# Altium PCB EN1190_EDP_Semester 2_PCB.PcbDoc
Units mm, origin at the board's own origin, x right, y up, seen from the top; angles counter-clockwise.
Board outline 93.34 x 62.61 mm, 2 copper layers (Top Layer, Bottom Layer); 47 components, 30 nets, 166 pads, 162 vias.
Unrouted connection lines stored in the file: 46.
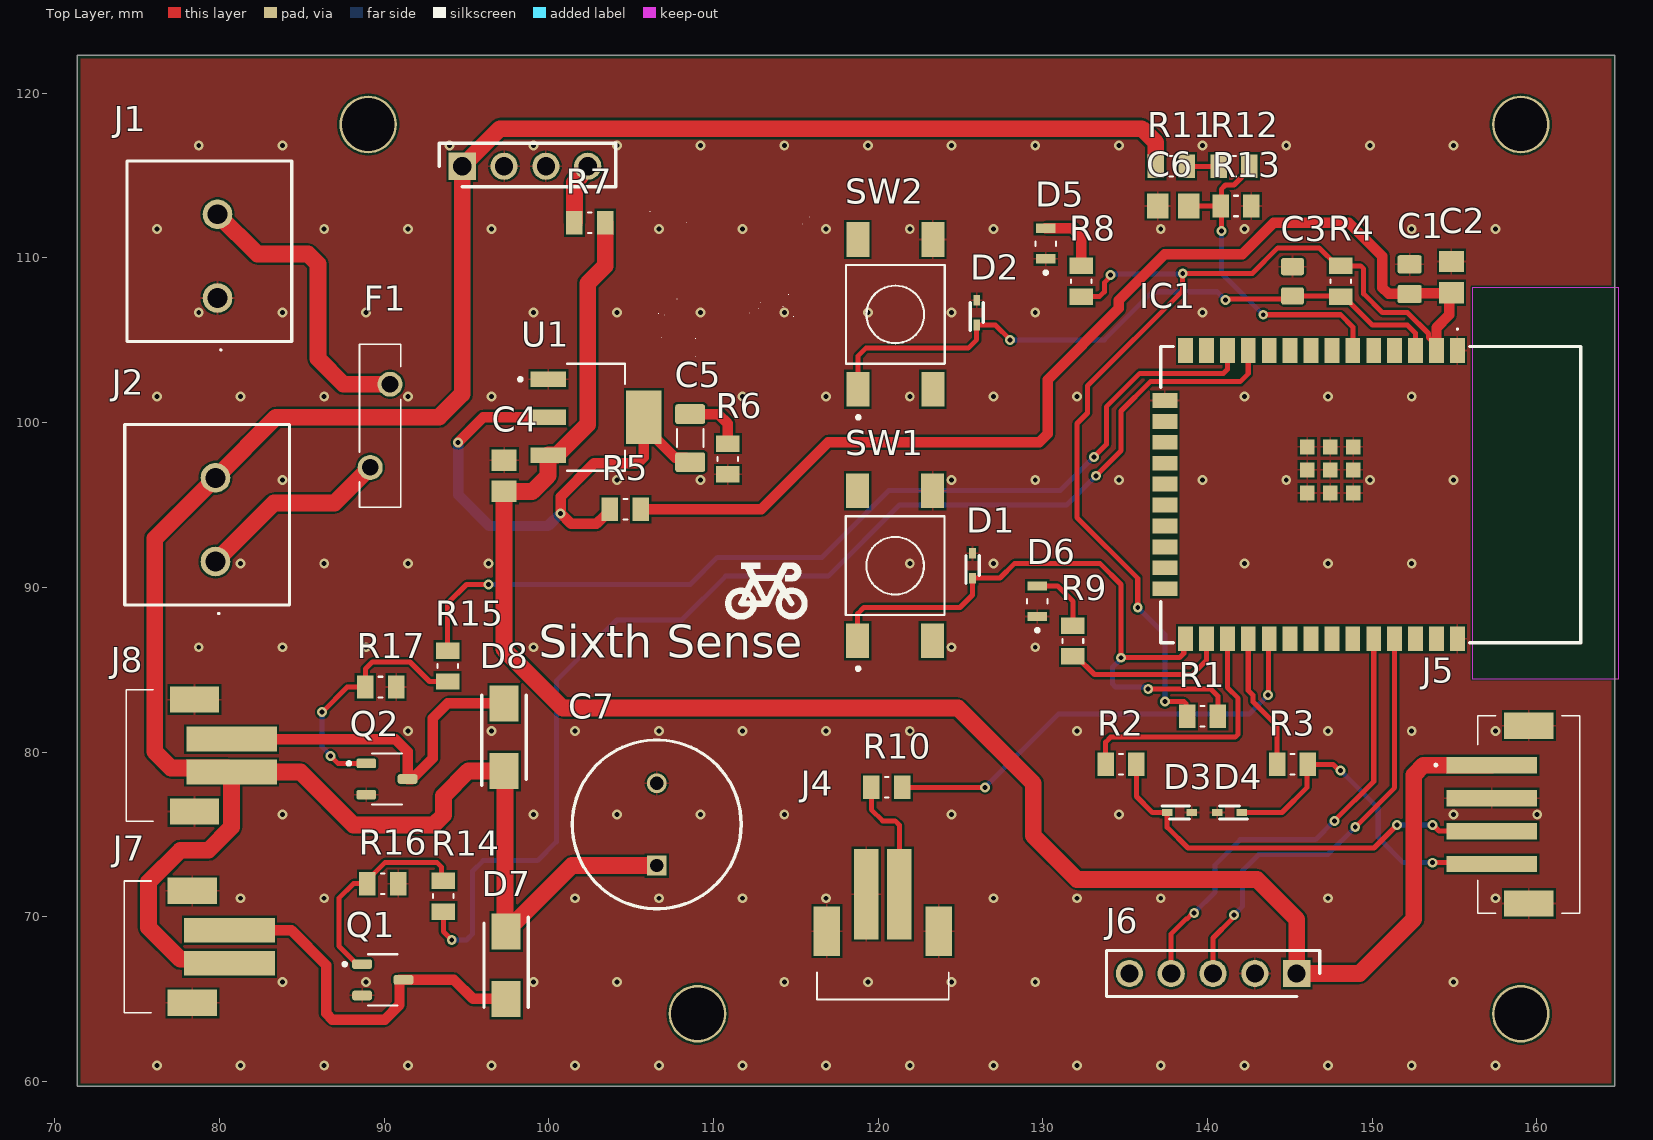
[diagram p0: Top Layer view]
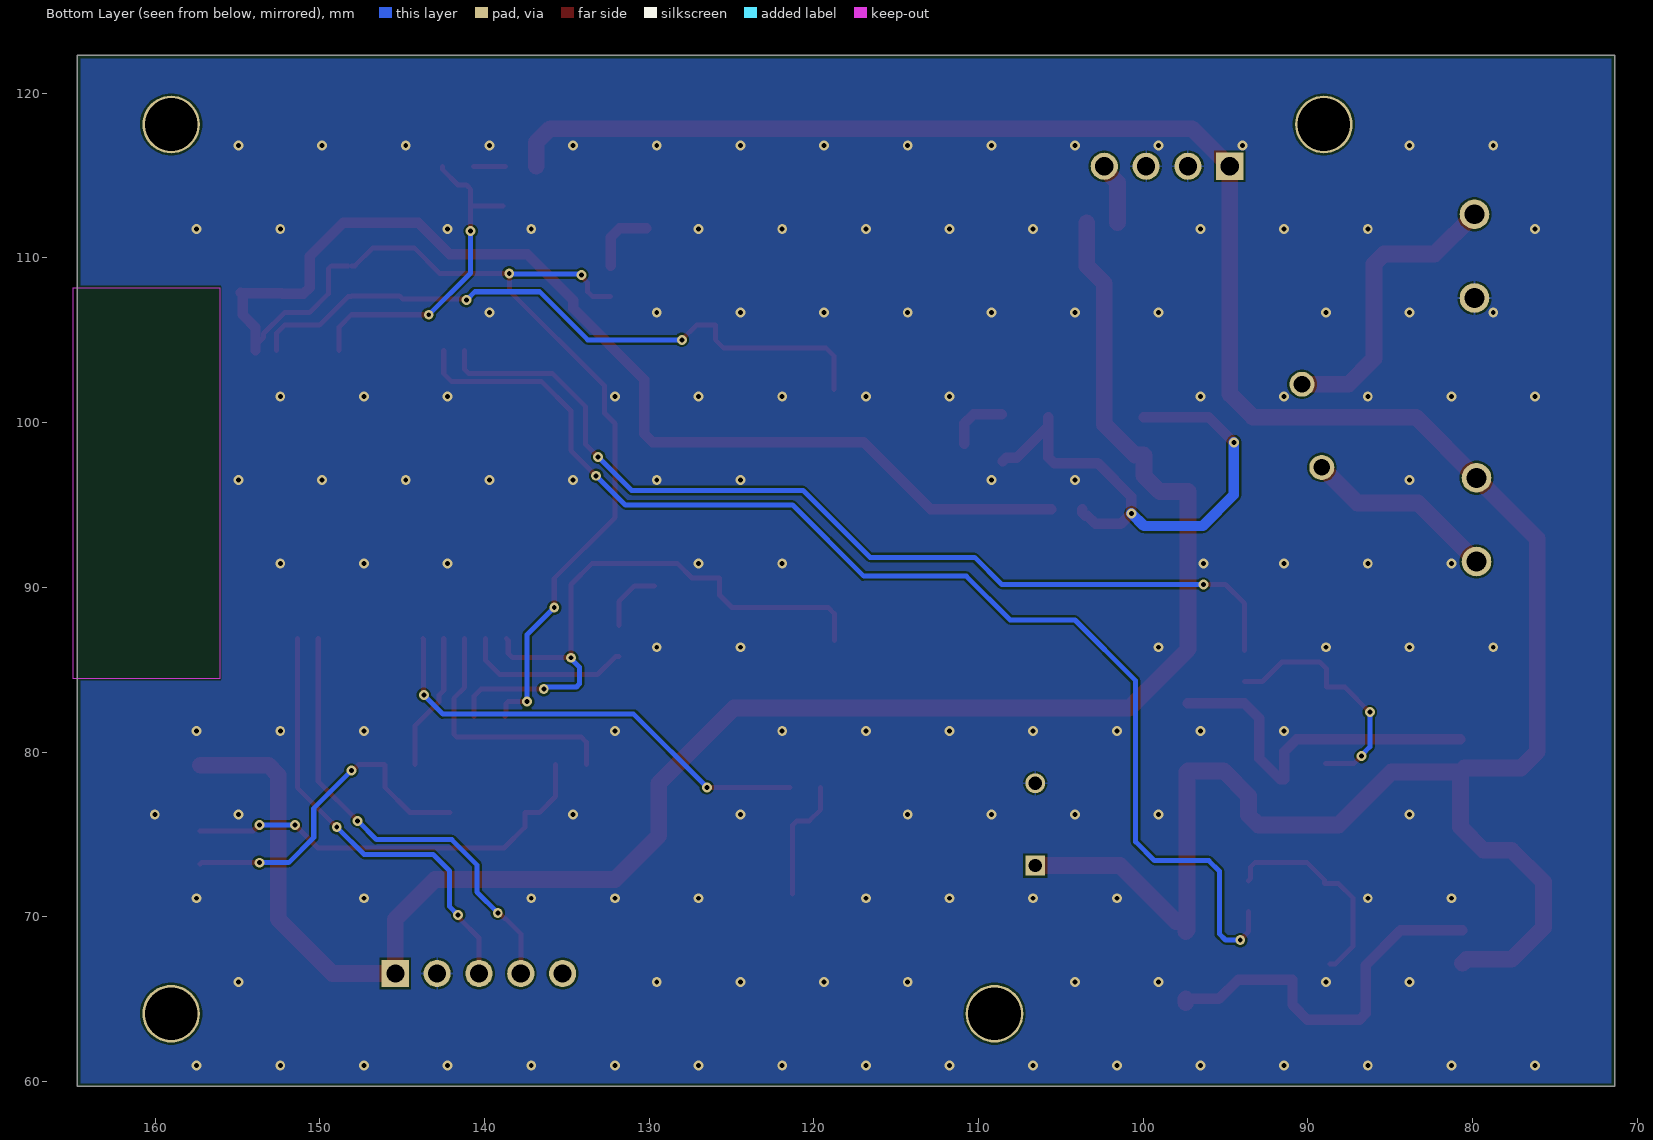
[diagram p1: Bottom Layer view, seen from below]
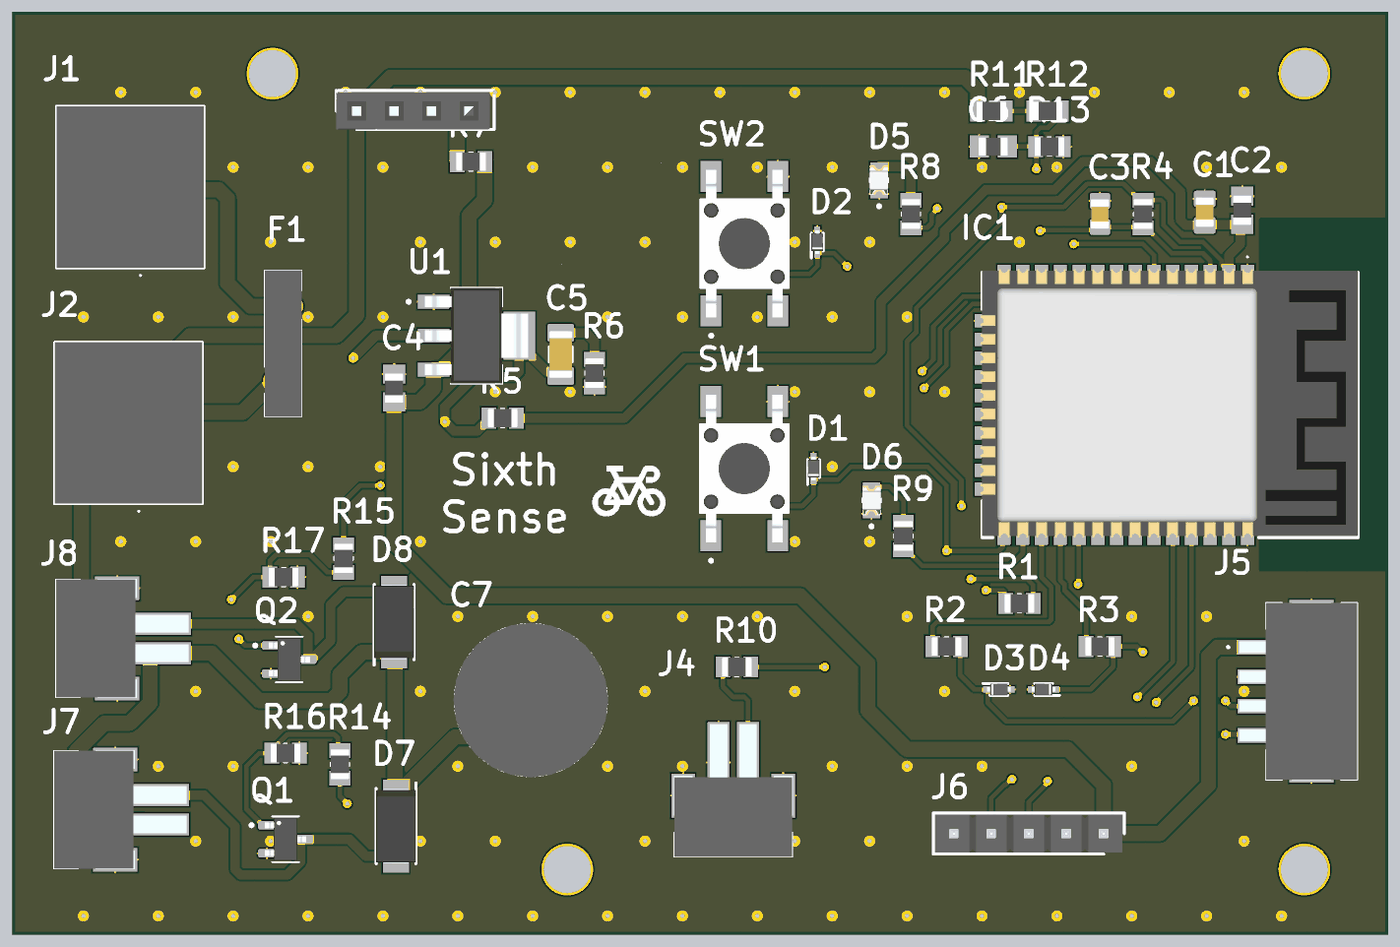
[diagram p2: 3D render of the assembled board from above, using the file's embedded part models]

## Layer stack, top to bottom
Top Solder: solder mask 0.0102, Solder Resist, Dk 3.5
Top Layer: signal copper 0.0356
Dielectric 1: dielectric 0.32, FR-4, Dk 4.8
Bottom Layer: signal copper 0.0356
Bottom Solder: solder mask 0.0102, Solder Resist, Dk 3.5

## Board outline
71.374,59.69 71.374,122.301 164.719,122.301 164.719,59.69

## Design rules (kind name [scope] priority, off if disabled: settings)
BoardOutlineClearance [All] p1: gap=0.2 ignorepadtopadclearanceinfootprint=FALSE
Clearance [All] p1: gap=0.127 ignorepadtopadclearanceinfootprint=FALSE except(0.25: Arc-Hole Track-Hole SMDPad-Hole THPad-Hole Via-Hole Fill-Hole Poly-Hole Region-Hole Text-Hole)
ComponentClearance [All] p1: gap=0.127 collisioncheckmode=3 verticalgap=0.127 showdistances=TRUE
DiffPairsRouting [All] p1: maxlimit=0.254 minlimit=0.127 mostfreqgap=0.127 toplayer_minwidth=0.127 toplayer_maxwidth=25.4 toplayer_prefwidth=0.127 bottomlayer_minwidth=0.127 bottomlayer_maxwidth=25.4 bottomlayer_prefwidth=0.127 maxuncoupledlength=12.7
Height [All] p1: minheight=0 maxheight=1816.048 prefheight=12.7
HoleSize [All] p1: absolutevalues=TRUE maxlimit=6.3 minlimit=0.3 maxpercent=80.000 minpercent=20.000
HoleToHoleClearance [All] p1: gap=0.25 allowstackedmicrovias=FALSE
MinimumAnnularRing [All] p1: minimumring=0.076
MinimumSolderMaskSliver [All] p1: minsoldermaskwidth=0
PlaneClearance [All] p1: clearance=0.127
PlaneConnect PlaneConnectPowerPads [InPadClass('PowerPads')] p1: planeconnectstyle=Direct reliefexpansion=0.508 reliefentries=4 reliefconductorwidth=0.254 reliefairgap=0.254
PlaneConnect [All] p2: pad.planeconnectstyle=Relief pad.reliefexpansion=0.3 pad.reliefentries=4 pad.reliefconductorwidth=0.127 pad.reliefairgap=0.127 via.planeconnectstyle=Direct via.reliefexpansion=0.3 via.reliefentries=4 via.reliefconductorwidth=0.127 via.reliefairgap=0.127
PolygonConnect PolygonConnectPowerPads [All vs (InPadClass('PowerPads'))] p1: connectstyle=Direct reliefconductorwidth=0.254 reliefentries=4 polygonreliefangle="90 Angle" airgapwidth=0.254
PolygonConnect [All] p2: thpad.connectstyle=Relief thpad.reliefconductorwidth=0.127 thpad.reliefentries=4 thpad.polygonreliefangle="90 Angle" thpad.airgapwidth=0.127 smdpad.connectstyle=Relief smdpad.reliefconductorwidth=0.127 smdpad.reliefentries=4 smdpad.polygonreliefangle="90 Angle" smdpad.airgapwidth=0.127 via.connectstyle=Direct via.reliefconductorwidth=0.127 via.reliefentries=4 via.polygonreliefangle="90 Angle" via.airgapwidth=0.127
RoutingVias [All] p1: holewidth=0.3 width=0.6 viastyle="Through Hole" minholewidth=0.3 minwidth=0.6 maxholewidth=0.6 maxwidth=6.6
SilkToSilkClearance [All] p1: silktosilkclearance=0
SilkToSolderMaskClearance [IsPad] p1: minsilkscreentomaskgap=0.127 clearancetoexposedcopper=TRUE
SolderMaskExpansion [All] p1: expansion=0.075 istentingtop=FALSE
Width [All] p1: maxlimit=25.4 minlimit=0.127 preferedwidth=0.127 minimp=50.000000 maximp=50.000000 favimp=50.000000
20 further rules are at their usual default settings.

## Components (designator, comment, footprint, x,y, rotation, side; value= is the part's Value field where it differs from the comment)
C1 "10uF" CAPC2012X145N 152.273,108.712 r270 top
C2 "100nF" CAPC2012X70 154.813,108.839 r90 top
C3 "1uF" CAPC2012X135N 145.161,108.585 r270 top
C4 "100nF" CAPC2012X70 97.282,96.774 r270 top
C5 "22uF" CAPC3216X180N 108.585,99.06 r270 top
C6 "100nF" CAPC2012X70 137.922,113.157 r0 top
C7 "470uF" CAPPRD500W60D1025H1400 106.553,73.105 r90 top value="470 uF"
D1 "ESD5Z3.3T1G" SODFL1608X70N 125.73,91.313 r90 top
D2 "ESD5Z3.3T1G" SODFL1608X70N 125.984,106.68 r90 top
D3 "ESD5Z3.3T1G" SODFL1608X70N 138.303,76.327 r0 top
D4 "ESD5Z3.3T1G" SODFL1608X70N 141.339,76.327 r180 top
D5 "KT-0805W" LED_KT-0805W 130.175,110.871 r90 top
D6 "KT-0805W" LED_KT-0805W 129.667,89.154 r90 top
D7 "SS34" DIOM5127X241N 97.409,67.056 r270 top
D8 "SS34" DIOM5127X241N 97.282,80.899 r90 top
F1 "RGEF500" RGEF500 90.354,102.332 r270 top
IC1 "ESP32-WROOM-32E-N4" ESP32WROOM32EN4 149.914,95.631 r270 top
J1 "WJ500V-5.08-2P" WJ500V5082P 79.883,107.569 r90 top
J2 "WJ500V-5.08-2P" WJ500V5082P 79.756,91.567 r90 top
J3 "MTF185-104SY1" RHDR4W64P0X254_1X4_1041X250X865P 94.742,115.57 r0 top
J4 "A2001WV-S-2P" A2001WVS2P 120.285,71.374 r180 top
J5 "A2001WV-S-4P" A2001WVS4P 159.512,76.2 r270 top
J6 "A2541WV-5P" HDRV5W64P0X254_1X5_1270X254X899P 145.415,66.548 r180 top
J7 "A2001WV-S-2P" A2001WVS2P 80.609,68.17 r90 top
J8 "A2001WV-S-2P" A2001WVS2P 80.736,79.785 r90 top
Q1 "AO3400A" SOT95P280X125-3N 89.916,66.167 r0 top
Q2 "AO3400A" SOT95P280X125-3N 90.17,78.359 r0 top
R1 "10K" RESC2012X65N 139.7,82.169 r180 top
R2 "0Ω" RESC2012X65N 134.747,79.248 r0 top
R3 "0Ω" RESC2012X65N 145.161,79.248 r0 top
R4 "10K" RESC2012X65N 148.082,108.585 r270 top
R5 "0Ω" RESC2012X65N 104.648,94.742 r0 top
R6 "1Ω" RESC2012X65N 110.871,97.79 r270 top
R7 "0Ω" RESC2012X65N 102.489,112.141 r180 top
R8 "330" RESC2012X65N 132.334,108.585 r270 top value="330 Ohms"
R9 "330" RESC2012X65N 131.826,86.741 r270 top value="330 Ohms"
R10 "330" RESC2012X65N 120.523,77.851 r0 top value="330 Ohms"
R11 "10K" RESC2012X65N 137.795,115.57 r180 top
R12 "10K" RESC2012X65N 141.605,115.57 r180 top
R13 "10K" RESC2012X65N 141.732,113.157 r180 top
R14 "100" "RESC2012X65N - duplicate" 93.599,71.247 r90 top value="100 ohm"
R15 "100" "RESC2012X65N - duplicate" 93.853,85.217 r270 top value="100 ohm"
R16 "10K" RESC2012X65N 89.916,72.009 r0 top
R17 "10K" RESC2012X65N 89.789,83.947 r0 top
SW1 "4-1437565-2" SW_4-1437565-2 121.031,91.313 r90 top
SW2 "4-1437565-2" SW_4-1437565-2 121.042,106.575 r90 top
U1 "TLV1117-33CDCYR" SOT230P700X180-4N 102.87,100.33 r0 top

## Footprints (in the part's own frame and the unit in brackets; to place one, negate y for a bottom-side part, rotate by r counter-clockwise, add the part's x,y. Pads: shape width x height; smd on the part's side, far side on the other; paste and mask are expansions set on the pad)
A2001WVS2P [mm]
  rect 1.5x5.5 smd: 1(-1,0) 2(1,0)
  rect 1.6x3 smd: MP1(3.4,2.25) MP2(-3.4,2.25)
  silkscreen extent -4,4.75 4,6.4, body extent -4.04,-2.6 4.04,6.4, height 6.52
A2001WVS4P [mm]
  rect 1x5.5 smd: 1(-3,-2.25) 2(-1,-2.25) 3(1,-2.25) 4(3,-2.25)
  rect 1.6x3 smd: MP1(-5.4,0) MP2(5.4,0)
  silkscreen extent -6,-5.7 6,3.1, body extent -6.04,-4.9 6.04,3.1, height 6.65
CAPC2012X70 [mm]
  rect 1.3x1.5 smd: 1(-0.95,0) 2(0.95,0)
  body extent -1,-0.63 1,0.63, height 0.7
CAPC2012X135N [mm]
  rrect25% 1.05x1.38 smd: 1(-0.888,0) 2(0.888,0)
  body extent -1,-0.63 1,0.63, height 1.35
CAPC2012X145N [mm]
  rrect25% 1.11x1.47 smd: 1(-0.9,0) 2(0.9,0)
  body extent -1,-0.63 1,0.63, height 1.45
CAPC3216X180N [mm]
  rrect25% 1.2x1.82 smd: 1(-1.46,0) 2(1.46,0)
  silkscreen extent -0.54,-0.8 0.54,0.8, body extent -1.6,-0.8 1.6,0.8, height 1.8
CAPPRD500W60D1025H1400 [mm]
  rect 1.2x1.2 hole 0.8: 1(0,0)
  round 1.2 hole 0.8: 2(5,0)
  silkscreen extent -2.62,-5.13 7.62,5.13, body extent -2.75,-5.24 7.75,5.24, height 14
DIOM5127X241N [mm]
  rect 2.2x1.75 smd: 1(-2.05,0) 2(2.05,0)
  silkscreen extent -2.93,-1.35 2.55,1.35, body extent -2.55,-1.35 2.55,1.35, height 2.41
ESP32WROOM32EN4 [mm]
  rect 1.5x0.9 smd: 1(-8.75,5.26) 2(-8.75,3.99) 3(-8.75,2.72) 4(-8.75,1.45) 5(-8.75,0.18) 6(-8.75,-1.09) 7(-8.75,-2.36) 8(-8.75,-3.63) 9(-8.75,-4.9) 10(-8.75,-6.17) 11(-8.75,-7.44) 12(-8.75,-8.71) 13(-8.75,-9.98) 14(-8.75,-11.25) 25(8.75,-11.25) 26(8.75,-9.98) 27(8.75,-8.71) 28(8.75,-7.44) 29(8.75,-6.17) 30(8.75,-4.9) 31(8.75,-3.63) 32(8.75,-2.36) 33(8.75,-1.09) 34(8.75,0.18) 35(8.75,1.45) 36(8.75,2.72) 37(8.75,3.99) 38(8.75,5.26)
  rect 0.9x1.5 smd: 15(-5.715,-12.5) 16(-4.445,-12.5) 17(-3.175,-12.5) 18(-1.905,-12.5) 19(-0.635,-12.5) 20(0.635,-12.5) 21(1.905,-12.5) 22(3.175,-12.5) 23(4.445,-12.5) 24(5.715,-12.5)
  rect 0.9x0.9 smd: 39(-2.9,-1.06) 40(-2.9,-2.46) 41(-2.9,-3.86) 42(-1.5,-3.86) 43(-0.1,-3.86) 44(-0.1,-2.46) 45(-0.1,-1.06) 46(-1.5,-1.06) 47(-1.5,-2.46)
  silkscreen extent -10.1,-12.75 9,12.75, body extent -9.21,-12.84 8.98,12.75, height 3.2
HDRV5W64P0X254_1X5_1270X254X899P [mm]
  rect 1.65x1.65 hole 1.1: 1(0,0)
  round 1.65 hole 1.1: 2(2.54,0) 3(5.08,0) 4(7.62,0) 5(10.16,0)
  silkscreen extent -1.4,-1.4 11.56,1.4, body extent -1.27,-1.27 11.43,1.27, height 8.99
LED_KT-0805W [mm]
  rect 0.57x1.2 smd: 1(-0.925,0) 2(0.925,0)
  silkscreen extent -1.86,-0.63 0.13,0.63, body extent -1,-0.63 1,0.63, height 0.8
RESC2012X65N [mm]
  rect 1x1.42 smd: 1(-0.935,0) 2(0.935,0)
  silkscreen extent -0.12,-0.63 0.12,0.63, body extent -1,-0.63 1,0.63, height 0.65
"RESC2012X65N - duplicate" [mm]
  rect 1x1.42 smd: 1(-0.935,0) 2(0.935,0)
  silkscreen extent -0.12,-0.63 0.12,0.63, body extent -1,-0.63 1,0.63, height 0.65
RGEF500 [mm]
  round 1.515 hole 1.01: 1(0,0) 2(5.05,-1.2)
  silkscreen extent -2.42,-1.85 7.47,0.65, body extent -2.42,-1.85 7.47,0.65, height 14.4
RHDR4W64P0X254_1X4_1041X250X865P [mm]
  rect 1.65x1.65 hole 1.1: 1(0,0)
  round 1.65 hole 1.1: 2(2.54,0) 3(5.08,0) 4(7.62,0)
  silkscreen extent -1.4,-1.25 9.32,1.4, body extent -1.4,-1.25 9.02,1.25, height 8.65
SODFL1608X70N [mm]
  rect 0.64x0.42 smd: 1(-0.75,0) 2(0.75,0)
  silkscreen extent -1.07,-0.4 0.6,0.4, body extent -0.8,-0.4 0.8,0.4, height 0.7
SOT95P280X125-3N [mm]
  rrect50% 1.21x0.59 smd: 1(-1.255,0.95) 2(-1.255,-0.95) 3(1.255,0)
  silkscreen extent -2.41,-1.55 0.9,1.55, body extent -1.4,-1.45 1.4,1.45, height 1.25
SOT230P700X180-4N [mm]
  rect 2.15x0.95 smd: 1(-2.9,2.3) 2(-2.9,0) 3(-2.9,-2.3)
  rect 2.15x3.25 smd: 4(2.9,0)
  silkscreen extent -4.7,-3.25 1.75,3.25, body extent -3.5,-3.25 3.5,3.25, height 1.8
SW_4-1437565-2 [mm]
  rect 2.1x1.4 smd: 1(-4.55,2.275) 2(4.55,2.275) 3(-4.55,-2.275) 4(4.55,-2.275)
  silkscreen extent -6.35,-3 3,3, body extent -5,-3 5,3, height 5.38
WJ500V5082P [mm]
  round 1.8 hole 1.2: 1(0,0) 2(5.08,0)
  silkscreen extent -3.2,-4.5 8.32,5.5, body extent -2.64,-4.5 8.32,5.5, height 14.3

## Part data
C1: library part CL21A106KAYNNNE, "10uF ±10% 25V Ceramic Capacitor X5R 0805", JLCPCB Part Number=C15850, Manufacturer="Samsung Electro-Mechanics", ComponentLink1Description=Datasheet, ComponentLink1URL=https://jlc-prod-smt.oss-eu-central-1.aliyuncs.com/smtDataManualFile/8579706853607202816-C15850.pdf?response-content-disposition=attachment%3B%20filename%3DC15850.pdf%3B%20filename%2A%3DUTF-8%27%27C15850.pdf&x-oss-date=20260411T105511Z&x-oss-expires=1800&x-oss-security-token=CAISgAN1q6Ft5B2yfSjIr5mHBczCp%2BpM0aimbG72lWcPTrsdp4f41zz2IHhMdHJsAOodtv0%2FmmhT6PkclqRLcbhpcmfjV%2BZHzLB8qakU4QF%2B4J7b16cNrbH4M4H6aXeirtuwDsz9SNTCALjPD3nPii50x5bjaDymRCbLGJaViJlhHLN1Ow6jdmhpCctxLAlvo9NgFxm3D%2Fu2NQPwiWf9FVdhvhEG6Vly8qOi2MaRmFy8yFTx0b0SvJ%2BjYMrmPctoN9JnSdC5mfdzau3a1TJ84gRD0a5wkaVA1zbDs5bfISEIuUzebreLqY03dV4mOvdqIcMe8qigz88fk%2FfIioH6xyxKOexoSCnFTOiiupCcQLPyao9jLu6iayqViY7QaIOTqQohZmkAMwVOasAsI3Ngh4zF97Qt0cVNkXO9gWfLI8DtuMleWsqp384DfnSgc5lCkRRYwGs1287ugXlSQzo890KPDAEovaKCnZ2ZSfh7Y4sNknI6i%2Bfc2Se2MIkISql4QaKWD5sagAEl%2FZh4y0mMFih4O2qONNFgo7OWr5xiyzqit1WFcmyLUIQ2NX%2Fko74FscrX5Z2PR81zrkE2%2BnLnFVK6SDKZ8Rrb9W3QelFNDx6QYlqH4AjNB9BxVOfYIzA8I8Ll0VvOEyDZ7hj5WXI%2BIfDeUmHR%2FNs6j%2FCz6XaWmqPEfMDbSSnTGiAA&x-oss-signature-version=OSS4-HMAC-SHA256&x-oss-credential=STS.NZ2NvvJ5mfjMnHGqgZB41HBS5%2F20260411%2Feu-central-1%2Foss%2Faliyun_v4_request&x-oss-signature=e4669f9a7ebed36f2888fbdcc03d20f0a9c6abf700cb8098047f1d5397c325ce, LCSC Part Number=C15850, Manufacturer Part Number=CL21A106KAYNNNE
C2 C4 C6: library part CC0805KRX7R9BB104, "100nF ±10% 50V Ceramic Capacitor X7R 0805", JLCPCB Part Number=C49678, Manufacturer=YAGEO, ComponentLink1Description=Datasheet, ComponentLink1URL=https://jlc-prod-smt.oss-eu-central-1.aliyuncs.com/smtDataManualFile/8579706882459549696-C49678.pdf?response-content-disposition=attachment%3B%20filename%3DC49678.pdf%3B%20filename%2A%3DUTF-8%27%27C49678.pdf&x-oss-date=20260411T120022Z&x-oss-expires=1800&x-oss-security-token=CAISgAN1q6Ft5B2yfSjIr5nGc%2B%2Fng%2BZTz6qoZ1LerE00VusYva%2FoiTz2IHhMdHJsAOodtv0%2FmmhT6PkclqRLcbhpcmfjV%2BZHzLB8qZxIqQR%2B4J7b16cNrbH4M4H6aXeirtuwDsz9SNTCALjPD3nPii50x5bjaDymRCbLGJaViJlhHLN1Ow6jdmhpCctxLAlvo9NgFxm3D%2Fu2NQPwiWf9FVdhvhEG6Vly8qOi2MaRmFy8yFTx0b0SvJ%2BjYMrmPctoN9JnSdC5mfdzau3a1TJ84gRD0a5wkaVA1zbDs5bfISEIuUzebreLqY03dV4mOvdqIcMe8qigz88fk%2FfIioH6xyxKOexoSCnFTOiiupCcQLPyao9jLu6iayqViY7QaIOTqQohZmkAMwVOasAsI3Ngh4zF97Qt0cVNkXO9gWfLI8DtuMleWgpjW%2BgjfnSgc5lCkRRYwGs1287ugXlSQzo890KPDAEovaKCnZ2ZSfh7Y4sNknI6i%2Bfc2Se2MIkIet4joqKWD5sagAGoaAFtiNH%2BVqesP4Xd%2FicMChU4hC%2BfFSKA8gk%2FP%2BHFmqX9GC9FZogyDW2xwxXMN%2BJ5kWUM5GYkddsvBUaVRQY2O5hriYbqbheGKrzCEsRoZQpM1BVK9kdwDFJRIKfktOAz8byi%2FH7to7wLWy8UkpOhwQ%2B%2BZ%2FjjINlLWCMSxpgZsCAA&x-oss-signature-version=OSS4-HMAC-SHA256&x-oss-credential=STS.NZs8USn9rxhCetoHMaZd4RjCk%2F20260411%2Feu-central-1%2Foss%2Faliyun_v4_request&x-oss-signature=707c7aad44b40ae88f8940f66cbb3d06b4fd0582da1b3e21eb645b0540d9b004, LCSC Part Number=C49678, Manufacturer Part Number=CC0805KRX7R9BB104
C3: library part CL21B105KBFNNNE, "1uF ±10% 50V Ceramic Capacitor X7R 0805", JLCPCB Part Number=C28323, Manufacturer="Samsung Electro-Mechanics", ComponentLink1Description=Datasheet, ComponentLink1URL=https://jlcpcb.com/api/file/downloadByFileSystemAccessId/8579706862004473856, LCSC Part Number=C28323, Manufactuer Part Number=CL21B105KBFNNNE
C5: library part CL31A226KOHNNNE, "22uF ±10% 16V Ceramic Capacitor X5R 1206", Dielectric=X5R, LCSC Part Number=C90146, Package=1206, Voltage Rating=16V, ComponentLink1Description=Datasheet, ComponentLink1URL=https://www.lcsc.com/datasheet/C90146.pdf?spm=wm.sxq.inf.ggs___wm.ssy.bg.0.xh&lcsc_vid=RABaBF1SE1RfBlVeElBYVQJWQVdaBVJRQ1JYAwFXQFYxVlNRQlFcXlNeTlVbUjsOAxUeFF5JWBYZEEoKFBINSQcJGk4dAgUUFAk%3D
C7: library part 25YXJ470M10X12.5, "470uF 25V Aluminum Electrolytic Capacitors Through Hole,D10xL12.5mm 10000hrs@105℃", JLCPCB Part Number=C88740, Manufacturer=Rubycon, ComponentLink1Description=Datasheet, ComponentLink1URL=https://jlc-prod-smt.oss-eu-central-1.aliyuncs.com/smtDataManualFile/8588887453180563456-C88740.pdf?response-content-disposition=attachment%3B%20filename%3DC88740.pdf%3B%20filename%2A%3DUTF-8%27%27C88740.pdf&x-oss-date=20260411T113131Z&x-oss-expires=1800&x-oss-security-token=CAISgAN1q6Ft5B2yfSjIr5mHBczCp%2BpM0aimbG72lWcPTrsdp4f41zz2IHhMdHJsAOodtv0%2FmmhT6PkclqRLcbhpcmfjV%2BZHzLB8qakU4QF%2B4J7b16cNrbH4M4H6aXeirtuwDsz9SNTCALjPD3nPii50x5bjaDymRCbLGJaViJlhHLN1Ow6jdmhpCctxLAlvo9NgFxm3D%2Fu2NQPwiWf9FVdhvhEG6Vly8qOi2MaRmFy8yFTx0b0SvJ%2BjYMrmPctoN9JnSdC5mfdzau3a1TJ84gRD0a5wkaVA1zbDs5bfISEIuUzebreLqY03dV4mOvdqIcMe8qigz88fk%2FfIioH6xyxKOexoSCnFTOiiupCcQLPyao9jLu6iayqViY7QaIOTqQohZmkAMwVOasAsI3Ngh4zF97Qt0cVNkXO9gWfLI8DtuMleWsqp384DfnSgc5lCkRRYwGs1287ugXlSQzo890KPDAEovaKCnZ2ZSfh7Y4sNknI6i%2Bfc2Se2MIkISql4QaKWD5sagAEl%2FZh4y0mMFih4O2qONNFgo7OWr5xiyzqit1WFcmyLUIQ2NX%2Fko74FscrX5Z2PR81zrkE2%2BnLnFVK6SDKZ8Rrb9W3QelFNDx6QYlqH4AjNB9BxVOfYIzA8I8Ll0VvOEyDZ7hj5WXI%2BIfDeUmHR%2FNs6j%2FCz6XaWmqPEfMDbSSnTGiAA&x-oss-signature-version=OSS4-HMAC-SHA256&x-oss-credential=STS.NZ2NvvJ5mfjMnHGqgZB41HBS5%2F20260411%2Feu-central-1%2Foss%2Faliyun_v4_request&x-oss-signature=1a71cdcfdccf2f12d85f81b9bbe3019779a73c3eac2156f4ea9bb6aa6537d4d7, LCSC Part Number=C88740, Manufacturer Part Number=25YXJ470M10X12.5
D1 D2 D3 D4: "14.1VC Clamp 11.2A Ipp TVS DIODE SOD-523", JLCPCB Part Number=C61148, Manufacturer=onsemi, Package=SOD-523, LCSC Part Number=C61148, Manufactuer Part Number=ESD5Z3.3T1G
D5 D6: "White LED Indication - Discrete 2.6V~3.2V 0805", JLCPCB Part Number=C34499, Manufacturer="Hubei KENTO Elec", Package=0805, ComponentLink1Description=Datasheet, ComponentLink1URL=https://jlc-prod-smt.oss-eu-central-1.aliyuncs.com/smtDataManualFile/8579709217554550784-C34499.pdf?response-content-disposition=attachment%3B%20filename%3DC34499.pdf%3B%20filename%2A%3DUTF-8%27%27C34499.pdf&x-oss-date=20260411T184242Z&x-oss-expires=1800&x-oss-security-token=CAISgAN1q6Ft5B2yfSjIr5rxL87d1ahJ54SaRGiFlmVtZtlOi%2FzfgDz2IHhMdHJsAOodtv0%2FmmhT6PkclqRLcbhpcmfjV%2BZHzLB8qedY9A1%2B4J7b16cNrbH4M4H6aXeirtuwDsz9SNTCALjPD3nPii50x5bjaDymRCbLGJaViJlhHLN1Ow6jdmhpCctxLAlvo9NgFxm3D%2Fu2NQPwiWf9FVdhvhEG6Vly8qOi2MaRmFy8yFTx0b0SvJ%2BjYMrmPctoN9JnSdC5mfdzau3a1TJ84gRD0a5wkaVA1zbDs5bfISEIuUzebreLqY03dV4mOvdqIcMe8qigz88fk%2FfIioH6xyxKOexoSCnFTOiiupCcQLPyao9jLu6iayqViY7QaIOTqQohZmkAMwVOasAsI3Ngh4zF97Qt0cVNkXO9gWfLI8DtuMleWhqk2cFN4NHD0eS19jklBdzSlusJRAJJUVBflCeKEaRNSAd3WGhEfM2%2BBt4QT30w5N2u00S8OSMI6E2D5aKWD5sagAFK8BQxMu8mWm493Yp8afuko%2BzCNYQ%2Fa05kesz6Q%2FupjBJH0QROBTrIeTMPgE8%2BlaT39xZqteU6mYIp0xOFqOLJoWNfG8KcrwmMtaWL3ntf0XKyARj9oJ%2FZoCX14gg3wra056deeiiUhn7e1b6JV2uHe3%2BhOvW6pNMsqkWNyqxHxSAA&x-oss-signature-version=OSS4-HMAC-SHA256&x-oss-credential=STS.NYDdti8whPFqFN4re8jVbd9tb%2F20260411%2Feu-central-1%2Foss%2Faliyun_v4_request&x-oss-signature=fb576c8a806889d858e314a909d44b6f08958b502a4255edb32084c04d6872af, LCSC Part Number=C34499, Manufacturer Part Number=KT-0805W
D7 D8: library part "SS34 SMA", "Diode Independent 40V 3A Surface Mount SMA(DO-214AC)", JLCPCB Part Number=C8678, Manufacturer="MDD(Microdiode Semiconductor)", ComponentLink1Description=Datasheet, ComponentLink1URL=https://www.lcsc.com/datasheet/C8678.pdf?spm=wm.sxq.inf.ggs___wm.ssy.bg.2.xh&lcsc_vid=RABaBF1SE1RfBlVeElBYVQJWQVdaBVJRQ1JYAwFXQFYxVlNRQlBfVVNfT1hcXzsOAxUeFF5JWBYZEEoKFBINSQcJGk4dAgUUFAk%3D, LCSC Part Number=C8678, Manufacturer Part Number=SS34
F1: "Polymeric PTC Resettable Fuse 16V 5A Through Hole P=5.08mm", JLCPCB Part Number=C468988, Manufacturer=Littelfuse, LCSC Part Number=C468988, Manufacturer Part Number=RGEF500
IC1: "2.4GHz On-board PCB Antenna -98dBm SMD,25.5x18mm RF Transceiver Modules and Modems RoHS", LCSC Part Number=C701341, Manufacturer_Name="Espressif Systems", Mouser Part Number=356-ESP32WRM32E132PH, ComponentLink1Description=Datasheet, ComponentLink1URL=https://jlcpcb.com/api/file/downloadByFileSystemAccessId/8588886930931535873, Datasheet Link=https://www.espressif.com/sites/default/files/documentation/esp32-wroom-32e_esp32-wroom-32ue_datasheet_en.pdf, Height=3.25mm, Manufacturer_Part_Number=ESP32-WROOM-32E-N4, Mouser Price/Stock=https://www.mouser.co.uk/ProductDetail/Espressif-Systems/ESP32-WROOM-32E-N4?qs=Li%252BoUPsLEnsPzTWsi%252BRMgQ%3D%3D
J1 J2: "2 Position Wire to Board Terminal Block Through Hole 5.08mm", JLCPCB Part Number=C8465, Manufacturer_Name="Ningbo Kangnex", ComponentLink1Description=Datasheet, ComponentLink1URL=https://www.lcsc.com/datasheet/C8465.pdf?spm=wm.sxq.inf.ggs___wm.ssy.bg.0.xh&lcsc_vid=RABaBF1SE1RfBlVeElBYVQJWQVdaBVJRQ1JYAwFXQFYxVlNRQlBcUlZfQFdbVDsOAxUeFF5JWBYZEEoKFBINSQcJGk4eFQsCAgIaSgADAwAHC0slRVNbVVZeWQkaCgg%3D, Datasheet Link=https://datasheet.lcsc.com/szlcsc/1912251636_Ningbo-Kangnex-Elec-WJ500V-5-08-2P_C8465.pdf, Height=14.2mm, LCSC Part Number=C8465, Manufacturer_Part_Number=WJ500V-5.08-2P
J3: "Female Header 4 Position 2.54mm Pitch Single Row Through Hole", LCSC Part Number=C358718, Manufacturer=Mintron, ComponentLink1Description=Datasheet, ComponentLink1URL=*https://www.lcsc.com/datasheet/C358718.pdf?spm=wm.sxq.inf.ggs___wm.ssy.bg.0.xh&lcsc_vid=RABaBF1SE1RfBlVeElBYVQJWQVdaBVJRQ1JYAwFXQFYxVlNRQlFdX1FeQFhaUzsOAxUeFF5JWBYZEEoKFBINSQcJGk4%3D, Pitch=2.54mm
J4 J7 J8: "Connector Header 2 position 2mm Pitch", JLCPCB Part Number=C225226, Manufacturer_Name="Changjiang Connectors", ComponentLink1Description=Datasheet, ComponentLink1URL=https://www.lcsc.com/datasheet/C225226.pdf?spm=wm.sxq.inf.ggs___wm.ssy.bg.0.xh&lcsc_vid=RABaBF1SE1RfBlVeElBYVQJWQVdaBVJRQ1JYAwFXQFYxVlNRQlBcVVBUQldZXzsOAxUeFF5JWBYZEEoKFBINSQcJGk4dAgUUFAk%3D, Datasheet Link=https://datasheet.lcsc.com/szlcsc/Changjiang-Connectors-A2001WV-S-2P_C225226.pdf, Height=6.42mm, LCSC Part Number=C225226, Manufacturer_Part_Number=A2001WV-S-2P
J5: "Connector Header 4 position 2mm Pitch", JLCPCB Part Number=C225228, Manufacturer_Name=CJT, ComponentLink1Description=Datasheet, ComponentLink1URL=https://www.lcsc.com/datasheet/C225228.pdf?spm=wm.sxq.inf.ggs___wm.ssy.bg.1.xh&lcsc_vid=RABaBF1SE1RfBlVeElBYVQJWQVdaBVJRQ1JYAwFXQFYxVlNRQlBcVFFXT1hWVDsOAxUeFF5JWBYZEEoKFBINSQcJGk4dAgUUFAk%3D, Datasheet Link=https://datasheet.lcsc.com/szlcsc/1912111437_CNJM-A2001WV-S-4P_C375145.pdf, Height=6.55mm, LCSC Part Number=C225228, Manufacturer_Part_Number=A2001WV-S-4P
J6: "Pin Header 5 Position 2.54mm Pitch Single Row Through Hole -40℃~+105℃", JLCPCB Part Number=C225480, Manufacturer_Name="Changjiang Connectors", ComponentLink1Description=Datasheet, ComponentLink1URL=https://jlcpcb.com/api/file/downloadByFileSystemAccessId/8588890082421428224, Datasheet Link=https://datasheet.lcsc.com/lcsc/2010160505_CJT-Changjiang-Connectors-A2541WV-5P_C225480.pdf, Height=8.99mm, LCSC Part Number=C225480, Manufacturer_Part_Number=A2541WV-5P
Q1 Q2: "N-Channel 30 V 5.7A (Ta) 1.4W (Ta) Surface Mount SOT-23-3", JLCPCB Part Number=C20917, Manufacturer=AOS, Package="SOT-23 Alpha &amp; Omega Semiconductor Inc.", Check_prices=https://www.snapeda.com/parts/AO3400A/Alpha/view-part/?ref=eda, ComponentLink1Description=Datasheet, ComponentLink1URL=https://jlcpcb.com/api/file/downloadByFileSystemAccessId/8550723985357750272, LCSC Part Number=C20917, Manufacturer Part Number=AO3400A, MF="Alpha & Omega Semiconductor", MP=AO3400A, SnapEDA_Link=https://www.snapeda.com/parts/AO3400A/Alpha/view-part/?ref=snap
R1 R4 R11 R12 R13 R16 R17: library part 0805W8F1002T5E, "10kΩ ±1% 125mW 0805 Thick Film Resistor", JLCPCB Part Number=C17414, Manufactuer=UNI-ROYAL, ComponentLink1Description=Datasheet, ComponentLink1URL=https://www.lcsc.com/datasheet/C17414.pdf?spm=wm.sxq.inf.ggs___wm.ssy.bg.0.xh&lcsc_vid=RABaBF1SE1RfBlVeElBYVQJWQVdaBVJRQ1JYAwFXQFYxVlNRQlFbUFdWRVVaXjsOAxUeFF5JWBYZEEoKFBINSQcJGk4dAgUUFAk%3D, LCSC Part Number=C17414, Manufactuer Part Number=0805W8F1002T5E
R2 R3 R5 R7: library part 0805W8F0000T5E, "0Ω ±1% 125mW 0805 Thick Film Resistor", JLCPCB Part Number=C17477, Manufacturer=UNI-ROYAL, Package=0805, ComponentLink1Description=Datasheet, ComponentLink1URL=https://jlc-prod-smt.oss-eu-central-1.aliyuncs.com/smtDataManualFile/8579706711109648384-C17477.pdf?response-content-disposition=attachment%3B%20filename%3DC17477.pdf%3B%20filename%2A%3DUTF-8%27%27C17477.pdf&x-oss-date=20260412T143321Z&x-oss-expires=1800&x-oss-security-token=CAISgAN1q6Ft5B2yfSjIr5nyO4nX2q9R5biEUnLE00gMPuhu3abSozz2IHhMdHJsAOodtv0%2FmmhT6PkclqRLcbhpcmfjV%2BZHzLB8qZpNjnBx4J7b16cNrbH4M4H6aXeirtuwDsz9SNTCALjPD3nPii50x5bjaDymRCbLGJaViJlhHLN1Ow6jdmhpCctxLAlvo9NgFxm3D%2Fu2NQPwiWf9FVdhvhEG6Vly8qOi2MaRmFy8yFTx0b0SvJ%2BjYMrmPctoN9JnSdC5mfdzau3a1TJ84gRD0a5wkaVA1zbDs5bfISEIuUzebreLqY03dV4mOvdqIcMe8qigz88fk%2FfIioH6xyxKOexoSCnFTOiiupCcQLPyao9jLu6iayqViY7QaIOTqQohZmkAMwVOasAsI3Ngh4zF97Qt0cVNkXO9gWfLI8DtuMleWgplTVFfmNHD0eS19jklBdzSlusJRAJJUVBflCeKEaRNSAd3WGhEfM2%2BBt4QT30w5N2u00S8OSMIWkFI%2FqKWD5sagAFMYmSDkmn%2F%2BcekIzcMzzdbVSwM0STcarjaoT26L9OtNgZTnB7H1R7N0I2dIqfiFkQhlHKlIxpCo4TPXjjrrO0nPu3nlPM6%2BybxLo79aULExC%2F2ecJLuyv9wwf9%2BDNc5qnlP8hW5eyApEr09dDbELjMi4nFhTVDGkVC96xISiqCoyAA&x-oss-signature-version=OSS4-HMAC-SHA256&x-oss-credential=STS.NZGp3c7ppRzoPTu7HY2gB2cyA%2F20260412%2Feu-central-1%2Foss%2Faliyun_v4_request&x-oss-signature=21e3d6807f7d7309755c64a3f8fcdaf05ac216ad67c57dfe14021958a16245de, LCSC Part Number=C17477, Manufacturer Part Number=0805W8F0000T5E
R6: library part 0805W8F100KT5E, "1Ω ±1% 125mW 0805 Thick Film Resistor", JLCPCB Part Number=C25271, Manufacturer=UNI-ROYAL, ComponentLink1Description=Datasheet, ComponentLink1URL=https://jlc-prod-smt.oss-eu-central-1.aliyuncs.com/smtDataManualFile/8579706684220100608-C25271.pdf?response-content-disposition=attachment%3B%20filename%3DC25271.pdf%3B%20filename%2A%3DUTF-8%27%27C25271.pdf&x-oss-date=20260411T192414Z&x-oss-expires=1800&x-oss-security-token=CAISgAN1q6Ft5B2yfSjIr5nwHf%2FBv5pz1ITfV1WGoHIEVcximK%2FSjTz2IHhMdHJsAOodtv0%2FmmhT6PkclqRLcbhpcmfjV%2BZHzLB8qeV9vRB%2B4J7b16cNrbH4M4H6aXeirtuwDsz9SNTCALjPD3nPii50x5bjaDymRCbLGJaViJlhHLN1Ow6jdmhpCctxLAlvo9NgFxm3D%2Fu2NQPwiWf9FVdhvhEG6Vly8qOi2MaRmFy8yFTx0b0SvJ%2BjYMrmPctoN9JnSdC5mfdzau3a1TJ84gRD0a5wkaVA1zbDs5bfISEIuUzebreLqY03dV4mOvdqIcMe8qigz88fk%2FfIioH6xyxKOexoSCnFTOiiupCcQLPyao9jLu6iayqViY7QaIOTqQohZmkAMwVOasAsI3Ngh4zF97Qt0cVNkXO9gWfLI8DtuMleWhrmUtJd4NHD0eS19jklBdzSlusJRAJJUVBflCeKEaRNSAd3WGhEfM2%2BBt4QT30w5N2u00S8OSMIXEoBg6KWD5sagAFM2bJhCWU10nwbpzu1GUCoVx5uuHCslNDM%2BlhQX6abpaI6ldYS%2F4qlTVCAsql0Hp%2BGi4MItIdcoGzjZjIIPLEJckf74CE6w7fsRPbBuw%2B0Xt0RphJySBq5WGFELtl%2FdJPtlxPln7sGlPKm%2F%2FedgNbbmSiw93ArFBzKJ2n9Ljzw3yAA&x-oss-signature-version=OSS4-HMAC-SHA256&x-oss-credential=STS.NZEVEuRERcF4Us7DrQYCNwjyo%2F20260411%2Feu-central-1%2Foss%2Faliyun_v4_request&x-oss-signature=38608f5da24cceb194364b95fe4b87cb62cdb2ea906a54d36b0422916f867635, LCSC Part Number=C25271, Manufacturer Part Number=0805W8F100KT5E
R8 R9 R10: library part 0805W8F3300T5E, "330Ω ±1% 125mW 0805 Thick Film Resistor", JLCPCB Part Number=C17630, Manufacturer=UNI-ROYAL, Package=0805, ComponentLink1Description=Datasheet, ComponentLink1URL=https://jlc-prod-smt.oss-eu-central-1.aliyuncs.com/smtDataManualFile/8579706569885270016-C17630.pdf?response-content-disposition=attachment%3B%20filename%3DC17630.pdf%3B%20filename%2A%3DUTF-8%27%27C17630.pdf&x-oss-date=20260411T175041Z&x-oss-expires=1800&x-oss-security-token=CAISgAN1q6Ft5B2yfSjIr5rxL87d1ahJ54SaRGiFlmVtZtlOi%2FzfgDz2IHhMdHJsAOodtv0%2FmmhT6PkclqRLcbhpcmfjV%2BZHzLB8qedY9A1%2B4J7b16cNrbH4M4H6aXeirtuwDsz9SNTCALjPD3nPii50x5bjaDymRCbLGJaViJlhHLN1Ow6jdmhpCctxLAlvo9NgFxm3D%2Fu2NQPwiWf9FVdhvhEG6Vly8qOi2MaRmFy8yFTx0b0SvJ%2BjYMrmPctoN9JnSdC5mfdzau3a1TJ84gRD0a5wkaVA1zbDs5bfISEIuUzebreLqY03dV4mOvdqIcMe8qigz88fk%2FfIioH6xyxKOexoSCnFTOiiupCcQLPyao9jLu6iayqViY7QaIOTqQohZmkAMwVOasAsI3Ngh4zF97Qt0cVNkXO9gWfLI8DtuMleWhqk2cFN4NHD0eS19jklBdzSlusJRAJJUVBflCeKEaRNSAd3WGhEfM2%2BBt4QT30w5N2u00S8OSMI6E2D5aKWD5sagAFK8BQxMu8mWm493Yp8afuko%2BzCNYQ%2Fa05kesz6Q%2FupjBJH0QROBTrIeTMPgE8%2BlaT39xZqteU6mYIp0xOFqOLJoWNfG8KcrwmMtaWL3ntf0XKyARj9oJ%2FZoCX14gg3wra056deeiiUhn7e1b6JV2uHe3%2BhOvW6pNMsqkWNyqxHxSAA&x-oss-signature-version=OSS4-HMAC-SHA256&x-oss-credential=STS.NYDdti8whPFqFN4re8jVbd9tb%2F20260411%2Feu-central-1%2Foss%2Faliyun_v4_request&x-oss-signature=036771816ae3764e31e07c85ed9730db8d6cf2b2603abf8dd139ac35ac504947, LCSC Part Number=C17630, Manufacturer Part Number=0805W8F3300T5E
R14 R15: library part 0805W8F1000T5E, "100Ω ±1% 125mW 0805 Thick Film Resistor", JLCPCB Part Number=C17408, Manufacturer=UNI-ROYAL, LCSC Part Number=C17408, Manufacturer Part Number=0805W8F1000T5E
SW1 SW2: "Switch Tactile OFF (ON) SPST Round Button Gull Wing 0.05A 24VDC 1VA 9.18N SMD T/R", JLCPCB Part Number=C2680629, Manufacturer="TE Connectivity", Manufacturer Part Number=FSM4JSMATR, Package=None, Check_prices=https://www.snapeda.com/parts/FSM4JSMATR/TE+Connectivity+ALCOSWITCH+Switches/view-part/?ref=eda, ComponentLink1Description=Datasheet, ComponentLink1URL=https://jlcpcb.com/api/file/downloadByFileSystemAccessId/8589835793184423936, LCSC Part Number=C2680629, MF="TE Connectivity", MP=FSM4JSMATR, SnapEDA_Link=https://www.snapeda.com/parts/FSM4JSMATR/TE+Connectivity+ALCOSWITCH+Switches/view-part/?ref=snap
U1: "3.3V 15V Positive Fixed SOT-223 Voltage Regulators - Linear, Low Drop Out (LDO) Regulators RoHS", LCSC Part Number=C91728, ComponentLink1Description=Datasheet, ComponentLink1URL=https://www.lcsc.com/datasheet/C91728.pdf?spm=wm.sxq.inf.ggs___wm.ssy.bg.0.xh&lcsc_vid=RABaBF1SE1RfBlVeElBYVQJWQVdaBVJRQ1JYAwFXQFYxVlNRQlFcUVRRRVhaUjsOAxUeFF5JWBYZEEoKFBINSQcJGk4dAgUUFAk%3D

## Free pads (board coordinates)
  round 3.5 hole 3.2: 1(89.027,118.11) 1(109.027,64.11) 1(159.027,64.11) 1(159.027,118.11)

## Via types
v1: diameter 0.6, hole 0.3, Top Layer to Bottom Layer, 162 vias

## Nets (pads, with @x,y where several pads share a name; then routed paths per layer and width w, separated by ;. In a path a pad name is that pad's centre, name@x,y a point inside that pad or via, vN(x,y) a via of type N, cw(c..) or ccw(c..) an arc to the next point about the centre after c; other vN are vias at no path point)
+3.3V: C1.2 C2.1 IC1.2 R1.2 R4.1 R5.2 R8.2 | length 125.2
  Top Layer w0.305: R8.2 133.431,107.65 133.731,107.95 133.731,108.505 134.112,108.886 v1(134.112,108.966) ; v1(135.763,88.773) 135.763,90.551 132.08,94.234 132.08,99.949 132.715,100.584 132.715,102.235 138.495,108.015 v1(138.495,109.062) 142.717,109.062 144.272,110.617 146.775,110.617 147.872,109.52 R4.1 ; v1(137.414,83.058) 138.557,83.058 138.684,82.931 138.684,82.25 R1.2 ; R4.1@148.292,109.52 149.3,109.52 149.479,109.341 149.479,107.823 150.622,106.68 152.146,106.68 153.416,105.41 153.416,105.169 153.904,104.681 IC1.2
  Top Layer w0.635: R5.2 112.903,94.742 116.967,98.806 129.794,98.806 130.302,99.314 130.302,102.616 134.62,106.934 134.62,107.442 137.414,110.236 142.113,110.236 144.018,112.141 148.59,112.141 150.622,110.109 150.622,108.191 150.994,107.819 152.266,107.819 C1.2 152.311,107.85 154.774,107.85 C2.1 154.686,107.762 154.686,106.553 153.904,105.771 IC1.2
  Bottom Layer w0.305: v1(134.112,108.966) 134.16,109.014 138.447,109.014 v1(138.495,109.062) ; v1(135.763,88.773) 137.414,87.122 v1(137.414,83.058)
+5V: C4.2 J5.1 J6.1 R7.1 U1.3 | length 112.1
  Top Layer w1.016: R7.1 103.424,109.52 102.362,108.458 102.362,99.888 100.504,98.03 U1.3 99.949,98.009 99.949,96.774 98.999,95.824 C4.2 97.282,86.233 100.838,82.677 124.841,82.677 129.413,78.105 129.413,74.93 132.08,72.263 143.002,72.263 145.415,69.85 J6.1 149.225,66.548 152.527,69.85 152.527,78.605 153.122,79.2 J5.1
+8.4V_RAW: F1.2 J2.1 | length 11.8
  Top Layer w1.016: J2.1 83.312,95.123 86.995,95.123 F1.2
+8.4V_SW: C7.1 D7.1 D8.1 J2.2 J3.1 J7.1 J8.1 R11.2 | length 157.9
  Top Layer w1.016: J7.1 80.367,67.412 77.622,67.412 75.692,69.342 75.692,72.101 77.626,74.035 79.334,74.035 80.736,75.437 J8.1 ; D7.1 97.346,69.17 97.346,78.785 D8.1 95.105,78.849 93.599,77.343 93.599,76.16 93.004,75.565 88.138,75.565 84.918,78.785 J8.1 ; D7.1@97.409,69.331 97.776,69.698 98.001,69.698 101.408,73.105 C7.1 ; R11.2 136.86,117.007 136.011,117.856 97.028,117.856 J3.1 94.742,101.727 93.345,100.33 83.439,100.33 J2.2 76.073,92.964 76.073,80.01 77.056,79.027 80.494,79.027 J8.1
GND: C1.1 C2.2 C3.1 C4.1 C6.1 C7.2 D1.2 D2.2 D3.2 D4.2 D5.1 D6.1 IC1.1 IC1.15 IC1.38 IC1.39 IC1.40 IC1.41 IC1.42 IC1.43 IC1.44 IC1.45 IC1.46 IC1.47 J1.1 J3.2 J3.3 J4.2 J4.MP1 J4.MP2 J5.2 J5.MP1 J5.MP2 J6.2 J7.MP1 J7.MP2 J8.MP1 J8.MP2 Q1.2 Q2.2 R6.2 R13.1 R16.2 R17.2 SW1.4 SW2.4 U1.1
  other v1: 76.2,60.96 81.28,60.96 86.36,60.96 91.44,60.96 96.52,60.96 101.6,60.96 106.68,60.96 111.76,60.96 116.84,60.96 121.92,60.96 127,60.96 132.08,60.96 137.16,60.96 142.24,60.96 147.32,60.96 152.4,60.96 157.48,60.96 83.82,66.04 88.9,66.04 99.06,66.04 104.14,66.04 114.3,66.04 119.38,66.04 124.46,66.04 129.54,66.04 154.94,66.04 81.28,71.12 86.36,71.12 101.6,71.12 106.68,71.12 111.76,71.12 116.84,71.12 127,71.12 132.08,71.12 137.16,71.12 147.32,71.12 157.48,71.12 83.82,76.2 99.06,76.2 104.14,76.2 109.22,76.2 114.3,76.2 124.46,76.2 134.62,76.2 154.94,76.2 160.02,76.2 91.44,81.28 96.52,81.28 101.6,81.28 106.68,81.28 111.76,81.28 116.84,81.28 121.92,81.28 132.08,81.28 147.32,81.28 152.4,81.28 157.48,81.28 78.74,86.36 83.82,86.36 88.9,86.36 99.06,86.36 124.46,86.36 129.54,86.36 81.28,91.44 86.36,91.44 91.44,91.44 96.347,91.44 121.92,91.44 127,91.44 142.24,91.44 147.32,91.44 152.4,91.44 83.82,96.52 104.14,96.52 109.22,96.52 124.46,96.52 129.54,96.52 134.62,96.52 139.7,96.52 144.78,96.52 149.86,96.52 154.94,96.52 76.2,101.6 81.28,101.6 86.36,101.6 91.44,101.6 96.52,101.6 111.76,101.6 116.84,101.6 121.92,101.6 127,101.6 132.08,101.6 142.24,101.6 147.32,101.6 152.4,101.6 78.74,106.68 83.82,106.68 88.9,106.68 99.06,106.68 104.14,106.68 109.22,106.68 114.3,106.68 119.38,106.68 124.46,106.68 129.54,106.68 139.7,106.68 76.2,111.76 86.36,111.76 91.44,111.76 96.52,111.76 106.68,111.76 111.76,111.76 116.84,111.76 121.92,111.76 127,111.76 137.16,111.76 142.24,111.76 152.4,111.76 157.48,111.76 78.74,116.84 83.82,116.84 93.98,116.84 99.06,116.84 104.14,116.84 109.22,116.84 114.3,116.84 119.38,116.84 124.46,116.84 129.54,116.84 134.62,116.84 139.7,116.84 144.78,116.84 149.86,116.84 154.94,116.84
IO4: IC1.26 R9.2 | length 10.2
  Top Layer w0.305: R9.2 132.036,85.806 133.133,84.709 139.065,84.709 139.934,85.578 IC1.26
IO5: IC1.29 R10.2 | length 28
  Top Layer w0.305: R10.2 v1(126.492,77.851) ; v1(143.683,83.463) 143.713,83.494 143.713,86.85 IC1.29
  Bottom Layer w0.305: v1(126.492,77.851) 130.937,82.296 142.516,82.296 v1(143.683,83.463)
IO16: D3.1 J5.3 R2.2 | length 26.1
  Top Layer w0.305: R2.2 135.682,77.297 136.652,76.327 D3.1 137.553,75.426 138.811,74.168 150.114,74.168 v1(151.511,75.565) ; v1(153.67,75.565) 153.69,75.565 154.055,75.2 J5.3
  Bottom Layer w0.305: v1(151.511,75.565) v1(153.67,75.565)
IO17: D4.1 J5.4 R3.2 | length 20.7
  Top Layer w0.305: D4.1 144.526,76.327 146.05,77.851 146.05,79.202 R3.2 147.621,79.248 148.002,78.867 v1(148.082,78.867) ; v1(153.67,73.279) 157.183,73.279 J5.4
  Bottom Layer w0.305: v1(148.082,78.867) 150.368,76.581 150.368,74.803 151.892,73.279 v1(153.67,73.279)
IO26: IC1.11 R14.1 | length 75.3
  Top Layer w0.305: R14.1 93.599,69.088 v1(94.107,68.58) ; v1(133.223,96.774) 134.747,98.298 134.747,100.711 136.525,102.489 141.986,102.489 142.474,102.977 IC1.11
  Bottom Layer w0.305: v1(94.107,68.58) 94.996,68.58 95.377,68.961 95.377,72.771 96.012,73.406 99.314,73.406 100.457,74.549 100.457,84.328 104.14,88.011 108.077,88.011 110.744,90.678 116.967,90.678 121.285,94.996 131.445,94.996 v1(133.223,96.774)
IO27: IC1.12 R15.1 | length 58.6
  Top Layer w0.305: R15.1 93.853,89.027 94.996,90.17 v1(96.347,90.17) ; v1(133.096,97.917) 133.858,98.679 133.858,100.965 135.89,102.997 140.97,102.997 141.204,103.231 IC1.12
  Bottom Layer w0.305: v1(96.347,90.17) 108.585,90.17 110.236,91.821 116.586,91.821 120.65,95.885 131.064,95.885 v1(133.096,97.917)
IO34: C6.2 IC1.6 R12.1 R13.2 | length 20.2
  Top Layer w0.305: C6.2 R13.2 ; v1(140.843,111.633) 140.843,113.111 R13.2 ; R12.1 142.54,115.36 141.607,114.427 141.097,114.427 140.843,114.173 140.843,113.203 R13.2 ; v1(143.383,106.553) 148.082,106.553 148.824,105.811 IC1.6
  Bottom Layer w0.305: v1(140.843,111.633) 140.843,109.093 v1(143.383,106.553)
NetC3_2: C3.2 D2.1 IC1.3 R4.2 SW2.1 | length 41.1
  Top Layer w0.305: SW2.1 118.767,104.035 119.253,104.521 125.461,104.521 125.984,105.044 D2.1 127.115,105.93 v1(128.016,105.029) ; v1(141.097,107.442) 141.153,107.498 144.962,107.498 C3.2 148.035,107.697 R4.2 148.292,107.65 150.024,105.918 152.146,105.918 152.634,105.43 IC1.3
  Bottom Layer w0.305: v1(128.016,105.029) 133.731,105.029 136.652,107.95 140.589,107.95 v1(141.097,107.442)
NetC5_1: C5.1 R6.1 | length 3.7
  Top Layer w0.635: C5.1 110.3,100.52 110.871,99.949 R6.1
NetC5_2: C5.2 R5.1 U1.2 U1.4 | length 34
  Top Layer w0.635: v1(94.488,98.806) 96.012,100.33 U1.2 ; R5.1 103.713,94.532 103.53,94.349 103.392,94.349 102.895,93.853 101.346,93.853 v1(100.711,94.488) 100.711,95.504 102.743,97.536 105.398,97.536 105.77,97.908 U1.4 105.77,99.78 107.667,97.883 108.302,97.883 C5.2@108.522,97.663
  Bottom Layer w0.635: v1(94.488,98.806) 94.488,95.631 96.393,93.726 99.949,93.726 v1(100.711,94.488)
NetD1_1: D1.1 IC1.25 R1.1 SW1.1 | length 39.1
  Top Layer w0.305: SW1.1 118.756,88.403 119.126,88.773 124.968,88.773 125.73,89.535 D1.1 127.393,90.563 128.27,91.44 133.477,91.44 134.747,90.17 v1(134.747,85.725) 138.303,85.725 138.557,85.979 138.557,86.774 IC1.25 ; v1(136.398,83.82) 140.208,83.82 140.635,83.393 R1.1
  Bottom Layer w0.305: v1(134.747,85.725) 134.747,85.67 134.239,85.162 134.239,84.126 134.418,83.947 136.271,83.947 v1(136.398,83.82)
NetD5_2: D5.2 R8.1 | length 4.1
  Top Layer w0.635: D5.2 131.79,111.796 132.334,111.252 R8.1
NetD6_2: D6.2 R9.1 | length 4
  Top Layer w0.305: D6.2 130.901,90.079 131.826,89.154 R9.1
NetD7_2: D7.2 J7.2 Q1.3 | length 23.3
  Top Layer w0.635: J7.2 84.373,69.17 86.487,67.056 86.487,64.126 86.859,63.754 90.043,63.754 90.932,64.643 90.932,66.145 90.954,66.167 Q1.3 94.234,66.167 95.395,65.006 D7.2
  Top Layer w1.016: D7.2@97.409,64.781 D7.2
NetD8_2: D8.2 J8.2 Q2.3 | length 21.9
  Top Layer w0.635: J8.2 90.665,80.785 91.44,80.01 91.44,78.374 Q2.3 91.69,78.359 92.964,79.633 92.964,82.042 93.871,82.949 D8.2
NetF1_1: F1.1 J1.2 | length 18.1
  Top Layer w1.016: J1.2 82.296,110.236 85.384,110.236 85.979,109.641 85.979,103.886 87.533,102.332 F1.1
NetIC1_27: IC1.27 R2.1 | length 15.7
  Top Layer w0.305: R2.1 133.812,80.599 134.112,80.899 141.68,80.899 141.859,81.078 141.859,83.264 141.204,83.919 IC1.27
NetIC1_28: IC1.28 R3.1 | length 8.4
  Top Layer w0.305: IC1.28 142.474,83.735 142.759,83.45 142.759,83.047 144.226,81.58 R3.1
NetJ3_4: J3.4 R7.2 | length 3.8
  Top Layer w1.016: R7.2 101.554,114.59 102.362,115.398 J3.4
NetJ4_1: J4.1 R10.1 | length 7.6
  Top Layer w0.305: R10.1 119.588,76.5 120.269,75.819 121.031,75.819 121.285,75.565 J4.1
NetQ1_1: Q1.1 R14.2 R16.1 | length 13
  Top Layer w0.305: Q1.1 88.351,67.117 87.249,68.219 87.249,71.12 88.138,72.009 R16.1 88.981,72.219 90.041,73.279 93.218,73.279 93.472,73.025 93.472,72.309 R14.2
NetQ2_1: Q2.1 R15.2 R17.1 | length 15.3
  Top Layer w0.305: v1(86.233,82.423) 87.757,83.947 R17.1 88.854,85.044 89.281,85.471 91.567,85.471 92.756,84.282 R15.2 ; v1(86.741,79.756) 87.188,79.309 Q2.1
  Bottom Layer w0.305: v1(86.233,82.423) 86.233,80.319 86.741,79.811 v1(86.741,79.756)
NetR11_1: R11.1 R12.2 | length 1.9
  Top Layer w0.305: R11.1 R12.2
RXD0: IC1.34 J6.4 | length 28.2
  Top Layer w0.305: J6.4 137.795,68.961 138.684,69.85 138.731,69.85 139.112,70.231 v1(139.192,70.231) ; v1(147.701,75.819) 150.094,78.212 IC1.34
  Bottom Layer w0.305: v1(139.192,70.231) 140.462,71.501 140.462,73.152 141.986,74.676 146.558,74.676 v1(147.701,75.819)
TXD0: IC1.35 J6.3 | length 27.4
  Top Layer w0.305: J6.3 140.335,68.707 141.478,69.85 141.478,69.897 141.605,70.024 v1(141.605,70.104) ; v1(148.971,75.438) 151.364,77.831 IC1.35
  Bottom Layer w0.305: v1(141.605,70.104) 142.113,70.612 142.113,72.771 143.129,73.787 147.32,73.787 v1(148.971,75.438)
pads on no net: IC1.4 IC1.5 IC1.7 IC1.8 IC1.9 IC1.10 IC1.13 IC1.14 IC1.16 IC1.17 IC1.18 IC1.19 IC1.20 IC1.21 IC1.22 IC1.23 IC1.24 IC1.30 IC1.31 IC1.32 IC1.33 IC1.36 IC1.37 J6.5 SW1.2 SW1.3 SW2.2 SW2.3

## Polygon pours and split planes (outlines as drawn)
GND on Bottom Layer "B_GND_L01_P001" (solid, remove dead copper, pour order 1): 71.374,59.69 71.374,122.301 164.719,122.301 164.719,59.69
GND on Top Layer "T_GND_L01_P000" (solid, remove dead copper, pour order 0): 71.374,59.69 71.374,122.301 164.719,122.301 164.719,59.69

## Keep-outs
Keep-Out Layer:
  rectangle: 156.083,84.455 164.973,108.204

## Silkscreen, mask and mechanical layers (free items; w line width, h text height)
Top Overlay:
  drawing of 62 lines, arcs and shapes, not listed
  text "Sixth Sense" at 99.399,85.725 h2
Mechanical 1:
  the board outline again, w0.5